# Altium PCB Flight-Controller.PcbDoc (part 3 of 3)
Units mm, origin at the board's own origin, x right, y up, seen from the top; angles counter-clockwise.
Board outline 68.4 x 90 mm, 8 copper layers (Top Layer (SIG), Int1 (GND), Int2 (PWR), Int3 (SIG), Int4 (GND), Int5 (SIG), Int6 (GND), Bottom Layer (SIG)), stack 1.559 mm thick; 188 components, 169 nets, 851 pads, 1097 vias.
Unrouted connection lines stored in the file: 2.
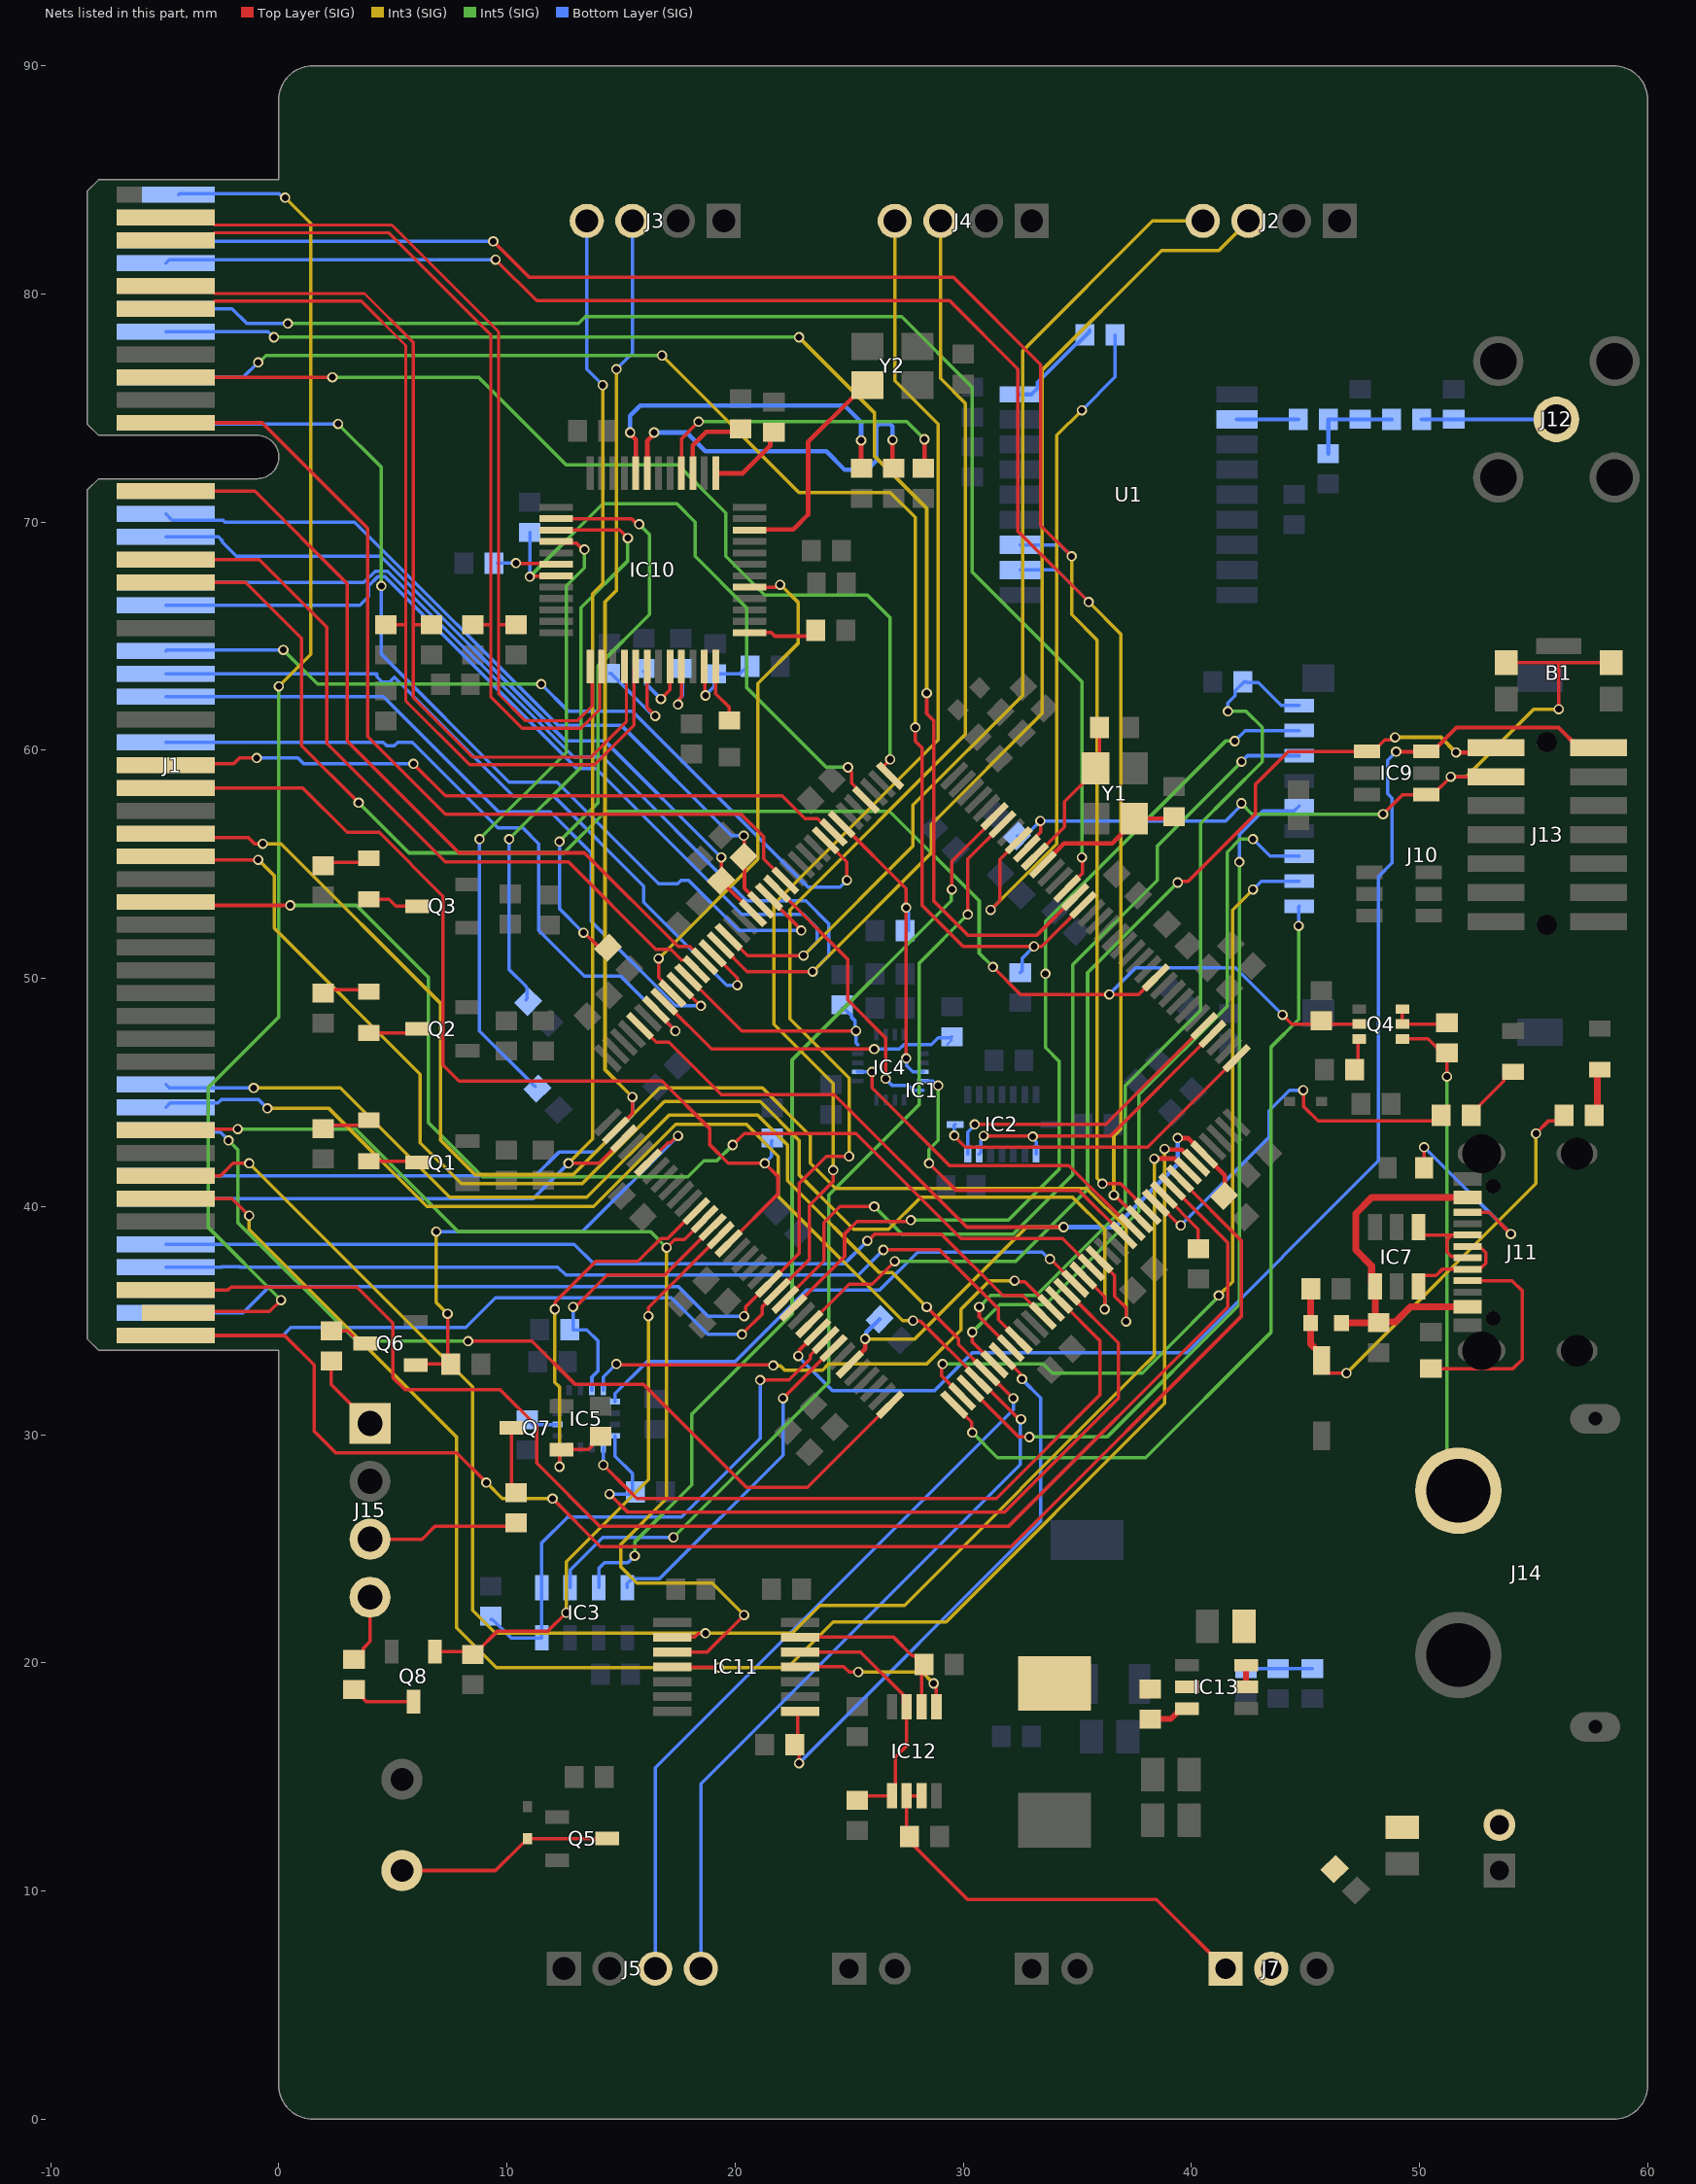
[diagram p9: the nets of this part, all layers, seen from the top]

## Via types
v1: diameter 0.45, hole 0.3, Top Layer (SIG) to Bottom Layer (SIG), tented both sides, 1085 vias
v2: diameter 0.6, hole 0.4, Top Layer (SIG) to Bottom Layer (SIG), tented both sides, 12 vias

## Nets (pads, with @x,y where several pads share a name; then routed paths per layer and width w, separated by ;. In a path a pad name is that pad's centre, name@x,y a point inside that pad or via, vN(x,y) a via of type N, cw(c..) or ccw(c..) an arc to the next point about the centre after c; other vN are vias at no path point) (continued)
EXTRA_PE9: IC1.59 J1.69 | length 33.2
  Top Layer (SIG) w0.15: IC1.59@19.016,51.102 20.1,50.018 v1(20.1,49.7)
  Bottom Layer (SIG) w0.15: J1.69@-4.95,63.35 4.3,63.35 4.3,63.224 4.534,62.99 4.866,62.99 5.071,63.195 10.266,58 12.041,58 16,54.041 16,53.334 19.634,49.7 v1(20.1,49.7)
EXTRA_PE10: IC1.60 J1.12 | length 36.2
  Top Layer (SIG) w0.15: J1.12@-4.95,71.35 -1.05,71.35 3,67.3 3,60.4 7.9,55.5 13.4,55.5 17.5,51.4 18.011,51.4 IC1.60@18.663,50.748
EXTRA_PE13: IC1.63 J1.70 | length 32.1
  Top Layer (SIG) w0.15: IC1.63@17.602,49.688 18.49,48.8 v1(18.5,48.8)
  Bottom Layer (SIG) w0.15: J1.70@-4.95,62.35 4.585,62.35 9.635,57.3 11.9,57.3 13.7,55.5 13.7,52.5 17.4,48.8 v1(18.5,48.8)
EXTRA_PG13: IC1.126 J1.30 | length 52.5
  Top Layer (SIG) w0.15: J1.30@-4.95,53.35 -4.8,53.2 v1(0.5,53.2) ; v1(19.9,42.7) 20.4,43.2 25.3,43.2 29.9,38.6 34.346,38.6 IC1.126@35.616,37.33
  Int5 (SIG) w0.15: v1(0.5,53.2) 3.4,53.2 6.55,50.05 6.55,43.68 8.93,41.3 17.934,41.3 18.634,42 19.2,42 v1(19.9,42.7)
"FC ETH RD_N": IC10.13 J1.2 R50.2 | length 39.9
  Top Layer (SIG) w0.135: J1.2@-4.95,83.35 -3.15,83.35 -2.818,83.018 4.956,83.018 9.635,78.339 9.635,62.465 10.8,61.3 13.1,61.3 13.732,61.932 13.732,63.58 IC10.13@13.65,63.662 ; 9.635,65.5 R50.2@10.4,65.5
"FC ETH RD_P": IC10.14 J1.3 R51.2 | length 40.5
  Top Layer (SIG) w0.135: J1.3@-4.95,82.35 -3.15,82.35 -2.818,82.683 4.817,82.683 9.3,78.2 9.3,65.5 ; R51.2@8.5,65.5 9.3,65.5 ; IC10.14@14.15,63.662 14.067,63.58 14.067,61.794 13.239,60.965 10.661,60.965 9.3,62.326 9.3,65.5
"FC ETH TD_N": IC10.16 J1.5 R43.1 | length 41.8
  Top Layer (SIG) w0.135: J1.5@-4.95,80.35 -3.15,80.35 -2.818,80.018 3.756,80.018 5.9,77.874 5.9,65.5 ; R43.1@6.7,65.5 5.9,65.5 ; IC10.16@15.15,63.662 15.232,63.58 15.232,62.913 15.232,61.232 13.7,59.7 8.5,59.7 5.9,62.3 5.9,65.5
"FC ETH TD_P": IC10.17 J1.6 R42.1 | length 42.4
  Top Layer (SIG) w0.135: J1.6@-4.95,79.35 -3.15,79.35 -2.818,79.683 3.617,79.683 5.565,77.735 5.565,65.5 ; R42.1@4.7,65.5 5.565,65.5 ; IC10.17@15.65,63.662 15.568,63.58 15.568,62.913 15.567,61.094 13.839,59.365 8.361,59.365 5.565,62.161 5.565,65.5
"FC FDCAN RX": IC1.136 J1.47 | length 63.5
  Top Layer (SIG) w0.15: J1.47@-4.95,36.35 -2.222,36.35 -2.097,36.475 3.425,36.475 5,34.9 5,32.5 5.529,31.971 9.701,31.971 11.3,30.372 11.3,28.759 14.059,26 32,26 41.6,35.6 41.6,38.418 IC1.136@39.152,40.866
"FC FDCAN TX": IC1.137 J1.49 | length 64
  Top Layer (SIG) w0.15: J1.49@-4.95,34.35 0.25,34.35 1.546,33.054 1.546,30.154 2.5,29.2 7.8,29.2 v1(9.1,27.9) ; v1(12,27.2) 14.1,25.1 32.1,25.1 42.2,35.2 42.2,38.5 39.505,41.195 IC1.137@39.505,41.219
  Int3 (SIG) w0.15: v1(9.1,27.9) 9.8,27.2 v1(12,27.2)
"GNSS RST": IC1.28 R27.1 | length 31
  Top Layer (SIG) w0.15: v1(31.2,53) 31.6,53.4 31.6,55.217 IC1.28@32.434,56.052
  Int3 (SIG) w0.15: v1(31.2,53) 34.1,55.9 34.1,73.8 v1(35.2,74.9)
  Bottom Layer (SIG) w0.15: v1(35.2,74.9) 36.66,76.36 R27.1@36.66,78.2
"GNSS RX": IC1.133 J1.52 U1.3 | length 82.6
  Top Layer (SIG) w0.15: v1(9.4,82.3) 10.962,80.738 29.562,80.738 33.4,76.9 33.4,69.85 v1(34.75,68.5) ; v1(36.1,41) 36.896,41 IC1.133@38.091,39.805
  Int3 (SIG) w0.15: v1(34.75,68.5) 34.75,65.95 35.872,64.828 35.872,41.238 36.1,41.01 v1(36.1,41)
  Bottom Layer (SIG) w0.15: J1.52@-4.95,82.35 -4.9,82.3 v1(9.4,82.3) ; U1.3@32.5,69 34.25,69 v1(34.75,68.5)
"GNSS TX": IC1.132 J1.53 U1.2 | length 82.7
  Top Layer (SIG) w0.15: v1(9.5,81.5) 11.3,79.7 29.4,79.7 32.4,76.7 32.4,69.6 v1(35.5,66.5) ; v1(36.6,40.5) 36.645,40.5 37.693,39.452 IC1.132@37.737,39.452
  Int3 (SIG) w0.15: v1(35.5,66.5) 36.9,65.1 36.9,43.4 36.6,43.1 v1(36.6,40.5)
  Bottom Layer (SIG) w0.15: J1.53@-4.95,81.35 -4.8,81.5 v1(9.5,81.5) ; U1.2@32.5,67.9 34.1,67.9 v1(35.5,66.5)
"HOT PLUG": J1.48 J1.50 | length 61.5
  Top Layer (SIG) w0.15: J1.48@-4.4,35.35 -4.35,35.4 -0.4,35.4 v1(0.1,35.9)
  Int5 (SIG) w0.15: v1(0,62.8) 0,48.3 -3.1,45.2 -3.1,39.1 v1(0.1,35.9)
  Int3 (SIG) w0.15: v1(0,62.8) 1.4,64.2 1.4,83.091 v1(0.276,84.216)
  Bottom Layer (SIG) w0.15: J1.50@-4.4,84.35 -4.35,84.4 0.01,84.4 0.194,84.216 v1(0.276,84.216)
"I2C4 SCL": IC1.53 J1.62 R6.2 | length 34.5
  Top Layer (SIG) w0.15: v1(20.38,56.254) 20.406,56.229 20.406,55.294 20.413,55.287 20.413,53.948 IC1.53@21.137,53.223
  Bottom Layer (SIG) w0.15: J1.62@-4.95,70.35 -4.675,70.075 -2.441,70.075 -2.366,70 3.326,70 12.226,61.1 15,61.1 19.846,56.254 v1(20.38,56.254)
"I2C4 SDA": IC1.54 J1.63 R4.2 | length 33.3
  Top Layer (SIG) w0.15: v1(19.4,55.3) 19.4,54.822 19.525,54.697 19.525,54.394 19.4,54.269 19.478,54.191 19.478,54.175 IC1.54@20.784,52.87
  Bottom Layer (SIG) w0.15: J1.63@-4.95,69.35 -2.65,69.35 -2.475,69.175 -2.475,69.124 -1.851,68.5 4.473,68.5 12.573,60.4 14.3,60.4 v1(19.4,55.3)
ICM_INT1: IC1.62 IC4.12 R21.1 | length 10.2
  Top Layer (SIG) w0.15: IC1.62@17.955,50.041 20.297,47.7 v1(25.3,47.7)
  Bottom Layer (SIG) w0.15: R21.1@24.7,48.7 24.775,48.7 25.1,48.375 25.1,48.3 25.25,48.15 25.25,47.75 v1(25.3,47.7) 25.3,47.175 IC4.12@25.375,47.1
ICM_INT2: IC1.65 IC4.19 R22.1 | length 14
  Top Layer (SIG) w0.15: IC1.65@16.895,48.981 18.975,46.9 v1(26.1,46.9)
  Bottom Layer (SIG) w0.1: R22.1@29.3,47.1 R22.1@29.5,47.3
  Bottom Layer (SIG) w0.15: v1(26.1,46.9) 27.2,46.9 27.4,47.1 27.623,47.1 27.628,47.095 27.926,47.095 27.931,47.1 IC4.19@28.225,47.1 28.6,47.1 28.893,47.393 29.453,47.393 R22.1@29.5,47.44
"JETSON RX": IC1.117 J1.95 | length 39.9
  Top Layer (SIG) w0.15: v1(26.5,38.1) 28.966,38.1 31.542,35.523 31.542,35.04 IC1.117@32.434,34.148
  Bottom Layer (SIG) w0.15: J1.95@-4.95,37.35 -2.5,37.35 -2.484,37.366 -1.716,37.366 -1.7,37.35 12.231,37.35 12.581,37 25.4,37 v1(26.5,38.1)
"JETSON TX": IC1.120 J1.94 | length 40.8
  Top Layer (SIG) w0.15: v1(25.8,38.5) 25.836,38.5 26.136,38.8 29.034,38.8 31.734,36.1 32.604,36.1 IC1.120@33.495,35.209
  Bottom Layer (SIG) w0.15: J1.94@-4.95,38.35 12.95,38.35 13.8,37.5 24.8,37.5 v1(25.8,38.5)
LPUART1_RX: IC1.99 IC9.6 J13.13 | length 59.8
  Top Layer (SIG) w0.181: v1(22.772,33.45) 22.824,33.501 22.824,33.713 IC1.99@23.612,34.502 ; v1(48.975,59.935) 50.56,59.935 51.616,60.991 56.089,60.991 56.97,60.11 J13.13@57.95,60.11
  Bottom Layer (SIG) w0.15: v1(22.772,33.45) 22.772,33.428 24.276,31.924 28.724,31.924 30.4,33.6 39.8,33.6 48.2,42 48.2,54.459 48.8,55.059 48.8,57.9 48.6,58.1 48.6,59.56 v1(48.975,59.935)
LPUART1_TX: IC1.98 IC9.1 J13.14 | length 47.4
  Top Layer (SIG) w0.15: IC1.98@23.259,34.855 25.007,36.603 26.003,36.603 v1(27,37.6) ; v1(39.4,54.2) 39.457,54.257 39.857,54.257 42.8,57.2 42.8,58.5 44.25,59.95 47.975,59.95 48.48,60.455 48.735,60.455 48.844,60.565 v1(48.925,60.565)
  Top Layer (SIG) w0.181: v1(51.6,59.9) 53.14,59.9 J13.14@53.35,60.11
  Int5 (SIG) w0.15: v1(27,37.6) 32.3,37.6 35.45,40.75 35.45,50.25 v1(39.4,54.2)
  Int3 (SIG) w0.181: v1(48.925,60.565) 50.935,60.565 v1(51.6,59.9)
"LVL SHIFT OE": IC1.115 IC11.8 R55.2 | length 25.3
  Top Layer (SIG) w0.15: v1(22.8,15.6) 22.8,16.375 22.75,16.425 22.75,17.775 IC11.8@22.85,17.875 ; IC1.115@31.727,33.441 32.518,32.651 32.518,32.493 v1(32.575,32.435)
  Bottom Layer (SIG) w0.15: v1(22.8,15.6) 33.4,26.2 33.4,31.61 v1(32.575,32.435)
"MAUWB1 RX": IC1.74 J1.91 J3.3 | length 63.5
  Top Layer (SIG) w0.15: IC1.74@14.773,43.341 14.773,43.357 15.5,44.084 v1(15.5,44.8)
  Int3 (SIG) w0.15: v1(14.8,76.7) 14.8,67 14.3,66.5 14.3,46 v1(15.5,44.8)
  Bottom Layer (SIG) w0.15: J1.91@-4.95,41.35 11.25,41.35 12.3,42.4 13.9,42.4 15.5,44 v1(15.5,44.8) ; v1(14.8,76.7) 15.5,77.4 J3.3@15.5,83.2
"MAUWB1 TX": IC1.75 J1.92 J3.4 | length 63.4
  Top Layer (SIG) w0.15: v1(12.7,41.9) 14.032,41.9 15.12,42.987 IC1.75@15.127,42.987
  Int3 (SIG) w0.15: v1(12.7,41.9) 13.758,42.958 13.758,66.858 14.2,67.3 v1(14.2,76)
  Bottom Layer (SIG) w0.15: J1.92@-4.95,40.35 11.15,40.35 v1(12.7,41.9) ; J3.4@13.5,83.2 13.5,76.7 v1(14.2,76)
"MAUWB2 RX": IC1.93 J1.97 J4.3 | length 81.6
  Top Layer (SIG) w0.15: v1(20.4,35.2) 20.457,35.257 20.457,35.59 IC1.93@21.491,36.623 22.8,37.932 22.8,41 24,42.2 v1(25,42.2)
  Int3 (SIG) w0.15: v1(25,42.2) 25,45.634 22.4,48.234 22.4,53 30.1,60.7 30.1,75.2 29,76.3 J4.3@29,83.2
  Bottom Layer (SIG) w0.15: J1.97@-4.95,35.35 -1.55,35.35 -0.4,36.5 17.5,36.5 18.8,35.2 v1(20.4,35.2)
"MAUWB2 TX": IC1.94 J1.98 J4.4 | length 81.9
  Top Layer (SIG) w0.15: v1(20.3,34.4) 21.2,35.3 21.2,35.613 21.845,36.257 IC1.94@21.845,36.27 23.25,37.675 23.25,40.05 24.3,41.1 v1(24.3,41.6)
  Int3 (SIG) w0.15: v1(24.3,41.6) 24.3,45.4 21.7,48 21.7,53.254 28.9,60.454 28.9,74.3 27,76.2 J4.4@27,83.2
  Bottom Layer (SIG) w0.15: J1.98@-4.95,34.35 0.184,34.35 0.534,34.7 8.2,34.7 9.5,36 17.2,36 18.8,34.4 v1(20.3,34.4)
MMC_INT: IC1.86 IC5.15 R23.1 | length 12.1
  Top Layer (SIG) w0.15: v1@12.9,35.5 14.4,37 16.918,37 IC1.86@19.016,39.098
  Bottom Layer (SIG) w0.15: v1@12.9,35.5 12.9,34.6 13.5,34.6 14,34.1 14,32.8 13.725,32.525 IC5.15@13.725,31.96
  other v1: 12.9,35.6
"MMWAVE DE": IC1.108 J1.89 | length 41.6
  Top Layer (SIG) w0.15: v1(8.3,34.1) 11.1,34.1 13,32.2 16,32.2 20.5,27.7 23.174,27.7 IC1.108@26.794,31.32
  Int5 (SIG) w0.15: v1(-2.2,42.9) -1.8,42.5 -1.8,39.3 3.4,34.1 v1(8.3,34.1)
  Bottom Layer (SIG) w0.15: J1.89@-4.95,43.35 -4.863,43.263 -2.563,43.263 v1(-2.2,42.9)
"MMWAVE RX": IC1.113 J1.87 J5.3 | length 78.4
  Top Layer (SIG) w0.15: v1(28.4,35.6) 29.8,34.2 29.8,33.954 IC1.113@31.02,32.734 31.043,32.734 32.177,31.6 v1(32.2,31.6)
  Int3 (SIG) w0.15: v1(-1.1,45.2) 2.705,45.2 7.502,40.404 13.504,40.404 17.1,44 21,44 22.3,42.7 22.3,41.134 26.334,37.1 26.9,37.1 v1(28.4,35.6)
  Bottom Layer (SIG) w0.15: J1.87@-4.95,45.35 -4.8,45.2 v1(-1.1,45.2) ; J5.3@16.5,6.6 16.5,15.4 32.2,31.1 v1(32.2,31.6)
"MMWAVE TX": IC1.112 J1.88 J5.4 | length 77.4
  Top Layer (SIG) w0.15: v1(27.8,35) 27.816,34.984 28.121,34.984 30.666,32.438 30.666,32.357 30.766,32.357 32.321,30.803 32.327,30.803 32.452,30.678 v1(32.533,30.678)
  Int3 (SIG) w0.15: v1(-0.5,44.3) 2.2,44.3 6.5,40 13.8,40 17.4,43.6 20.5,43.6 21.9,42.2 21.9,40.445 27.345,35 v1(27.8,35)
  Bottom Layer (SIG) w0.15: J1.88@-4.95,44.35 -4.763,44.537 -2.663,44.537 -2.5,44.7 -0.9,44.7 v1(-0.5,44.3) ; J5.4@18.5,6.6 18.5,14.7 32.5,28.7 32.5,30.645 v1(32.533,30.678)
NetBZ1_2: BZ1.2 D2.2 Q5.3 | length 9.6
  Top Layer (SIG) w0.15: BZ1.2@5.4,10.9 9.5,10.9 10.725,12.125 10.775,12.125 10.9,12.25 D2.2@10.9,12.3 Q5.3@14.4,12.3
NetC19_2: C19.2 C20.2 IC1.68 IC1.103 IC1.140 | length 46.5
  Top Layer (SIG) w0.15: IC1.68@15.834,47.92 16.554,47.2 17.1,47.2 19.4,44.9 24.35,44.9 30.15,39.1 v1(34.4,39.1)
  Top Layer (SIG) w0.2: IC1.103@25.027,33.088 25.7,33.761 v1(25.7,34.2) ; v1(39.4,43) 39.846,43 IC1.140@40.566,42.28 41.472,41.374 41.472,40.506 C19.2@41.433,40.467
  Int3 (SIG) w0.15: v1(25.7,34.2) 27.875,34.2 32.775,39.1 v1(34.4,39.1)
  Int3 (SIG) w0.2: v1@39.332,43 v1(39.4,43)
  Bottom Layer (SIG) w0.2: v1(25.7,34.2) 25.748,34.248 25.748,34.481 C20.2@26.333,35.067 ; v1(34.4,39.1) 36.65,39.1 39.4,41.85 v1(39.4,43)
NetC27_2: C27.2 IC1.25 Y1.3 | length 6.7
  Top Layer (SIG) w0.2: IC1.25@33.495,54.991 34.425,55.921 36.521,55.921 37.5,56.9 Y1.3@37.5,57 38.515,57 C27.2@39.348,57
NetC28_2: C28.2 IC1.26 Y1.1 | length 6.8
  Top Layer (SIG) w0.15: IC1.26@33.141,55.345 34.442,56.646 34.442,57.742 35.8,59.1 Y1.1@35.8,59.2 35.98,59.38 C28.2@35.98,61
NetC38_1: C38.1 IC5.10 | length 1.4
  Bottom Layer (SIG) w0.15: C38.1@10.9,30.66 11.11,30.45 IC5.10@12.215,30.45
NetC39_2: C39.2 FB2.1 IC7.4 J11.A4B9 J11.B4A9 | length 16.2
  Top Layer (SIG) w0.3: FB2.1@46.575,34.9 C39.2@48.19,34.9 ; J11.A4B9@52.1,35.6 49.6,35.6 48.944,34.944 48.234,34.944 C39.2@48.2,34.91 48.05,35.06 IC7.4@48.05,36.5 47.9,36.65 47.9,37.4 47.2,38.1 47.2,39.7 47.9,40.4 J11.B4A9@52.1,40.4
NetC40_2: C40.2 D1.2 FB2.2 R24.1 | length 20.2
  Top Layer (SIG) w0.15: D1.2@45.7,33.25 45.7,33 46,32.7 v1(46.8,32.7) ; v1(55.1,43.2) 55.663,43.763 55.963,43.763 R24.1@56.2,44
  Top Layer (SIG) w0.3: C40.2@45.24,36.4 45.233,36.393 45.233,34.908 FB2.2@45.225,34.9 45.225,33.975 45.7,33.5 D1.2@45.7,33.25
  Int3 (SIG) w0.15: v1(46.8,32.7) 55.1,41 v1(55.1,43.2)
NetC46_2: C46.2 C47.2 L1.1 R28.1 | length 4.3
  Bottom Layer (SIG) w0.185: L1.1@46,73 C46.2@46,74.5 C47.2@47.4,74.5 R28.1@48.78,74.5
NetC48_2: C48.2 J12.5 R28.2 | length 5.9
  Bottom Layer (SIG) w0.185: R28.2@50.1,74.5 C48.2@51.5,74.5 J12.5@56,74.5
NetC52_2: C52.2 IC10.37 | length 3.5
  Top Layer (SIG) w0.2: IC10.37@19.15,72.138 20.336,72.138 21.54,73.342 21.54,73.63 C52.2@21.75,73.84
NetC54_2: C54.2 C55.2 IC10.23 | length 4
  Top Layer (SIG) w0.15: IC10.23@18.65,63.662 18.675,63.637 18.675,62.425 v1(18.7,62.4)
  Bottom Layer (SIG) w0.15: v1(18.7,62.4) 19.088,62.788 19.088,63.338 19.09,63.34 20.19,63.34 C55.2@20.525,63.675
NetC56_1: C56.1 IC10.18 | length 5.1
  Top Layer (SIG) w0.15: IC10.18@16.15,63.662 16.15,61.85 v1(16.5,61.5)
  Bottom Layer (SIG) w0.15: C56.1@14.5,63.365 14.555,63.365 16.42,61.5 v1(16.5,61.5)
NetC62_1: C62.1 IC13.6 | length 1.8
  Top Layer (SIG) w0.25: C62.1@38.2,17.54 39.09,17.54 39.55,18 IC13.6@39.8,18
NetC62_2: C62.2 IC13.5 L2.1
NetC66_1: C66.1 R57.1 R58.2 | length 2.9
  Bottom Layer (SIG) w0.15: C66.1@42.4,19.76 R58.2@45.3,19.76
NetIC1_135: IC1.135 R3.1 | length 2.8
  Top Layer (SIG) w0.15: IC1.135@38.798,40.512 40.3,39.01 R3.1@40.3,38.3
NetIC7_1: IC7.1 J11.A6 J11.B6 | length 4.2
  Top Layer (SIG) w0.15: IC7.1@49.95,39.1 49.95,38.96 50.159,38.75 51.406,38.75 ; J11.A6@52.1,37.75 52.041,37.809 51.391,37.809 51.2,38 51.2,38.544 51.406,38.75 ; J11.B6@52.1,38.75 51.406,38.75
NetIC7_6: IC7.6 J11.A7 J11.B7 | length 4.9
  Top Layer (SIG) w0.15: IC7.6@49.95,36.5 49.95,36.775 50.159,36.985 50.732,36.985 50.998,37.25 J11.B7@52.1,37.25 52.159,37.31 52.699,37.31 52.911,37.521 52.911,37.979 52.699,38.19 52.159,38.19 J11.A7@52.1,38.25
NetIC10_6: IC10.6 R40.2 | length 2.6
  Top Layer (SIG) w0.15: v1(10.4,68.2) 10.425,68.175 12.137,68.175 IC10.6@12.162,68.15
  Bottom Layer (SIG) w0.15: R40.2@9.59,68.2 v1(10.4,68.2)
NetIC10_20: IC10.20 R38.1 | length 3.1
  Top Layer (SIG) w0.15: v1(16.75,62.25) 17.15,62.65 IC10.20@17.15,63.662
  Bottom Layer (SIG) w0.15: R38.1@16,63.45 16.087,63.363 16.087,62.913 v1(16.75,62.25)
NetIC10_21: IC10.21 R39.1 | length 3.3
  Top Layer (SIG) w0.15: v1(17.5,62) 17.557,62.057 17.557,62.239 17.65,62.331 IC10.21@17.65,63.662
  Bottom Layer (SIG) w0.15: v1(17.5,62) 17.557,62.057 17.557,62.239 17.7,62.381 17.7,63.375 R39.1@17.625,63.45
NetIC10_24: IC10.24 R52.1 | length 2.6
  Top Layer (SIG) w0.15: IC10.24@19.15,63.662 19.15,62.475 19.75,61.875 R52.1@19.75,61.3
NetIC10_25: IC10.25 R45.2 | length 2.9
  Top Layer (SIG) w0.15: IC10.25@20.638,65.15 21.6,65.15 21.75,65 23.15,65 R45.2@23.4,65.25
NetIC10_34: IC10.34 Y2.3 | length 9.7
  Top Layer (SIG) w0.2: IC10.34@20.638,69.65 20.661,69.673 22.548,69.673 23.2,70.325 23.2,73.5 25.2,75.5 25.7,76 Y2.3@25.8,76
NetIC10_39: IC10.39 R47.2 | length 3.6
  Top Layer (SIG) w0.2: IC10.39@18.15,72.138 18.15,73.35 18.75,73.95 R47.2@20.25,73.95
NetIC10_40: IC10.40 R49.2 | length 13.9
  Top Layer (SIG) w0.15: IC10.40@17.65,72.138 17.65,73.65 v1(18.4,74.4)
  Top Layer (SIG) w0.2: R49.2@28.25,72.5 28.3,72.55 v1(28.3,73.625)
  Int5 (SIG) w0.15: v1(18.4,74.4) 27.525,74.4 v1(28.3,73.625)
NetIC10_43: IC10.43 R41.2 | length 16.5
  Top Layer (SIG) w0.2: IC10.43@16.15,72.138 16.15,73.557 16.45,73.857 v1(16.45,73.925) ; v1(26.9,73.6) 26.9,72.55 R41.2@26.95,72.5
  Bottom Layer (SIG) w0.2: v1(16.45,73.925) 17.875,73.925 18.7,73.1 24,73.1 24.8,72.3 25.8,72.3 26.2,72.7 26.2,74.183 26.317,74.3 26.783,74.3 26.9,74.183 v1(26.9,73.6)
NetIC10_44: IC10.44 R44.2 | length 15.1
  Top Layer (SIG) w0.2: v1(15.4,73.925) 15.4,73.857 15.65,73.607 IC10.44@15.65,72.138 ; v1(25.525,73.576) 25.525,72.525 R44.2@25.55,72.5
  Bottom Layer (SIG) w0.2: v1(15.4,73.925) 15.4,74.65 15.85,75.1 24.8,75.1 25.525,74.375 v1(25.525,73.576)
NetIC11_11: IC11.11 IC12.5 | length 7.2
  Top Layer (SIG) w0.15: IC11.11@22.85,19.825 24.775,19.825 25,19.6 v1(25.4,19.6) ; v1(28.7,19.1) 28.7,19.05 28.825,18.925 IC12.5@28.825,18.075
  Int3 (SIG) w0.15: v1(25.4,19.6) 28.2,19.6 v1(28.7,19.1)
NetIC11_12: IC11.12 IC12.1 IC12.7 R56.2 | length 11.6
  Top Layer (SIG) w0.15: IC11.12@22.85,20.475 25.498,20.475 27.375,18.597 27.375,18.225 IC12.7@27.525,18.075 27.525,16.375 27.025,15.875 27.025,14.325 IC12.1@26.875,14.175 25.4,14.175 R56.2@25.35,14.125
NetIC11_13: IC11.13 IC12.6 R53.1 | length 7.7
  Top Layer (SIG) w0.15: IC11.13@22.85,21.125 26.95,21.125 27.75,20.325 27.825,20.325 28.15,20 28.15,19.925 28.175,19.9 IC12.6@28.175,18.075
NetIC12_2: IC12.2 IC12.3 J7.1 R54.1 | length 18.9
  Top Layer (SIG) w0.15: IC12.3@28.175,14.175 IC12.2@27.525,14.175 27.525,12.425 27.5,12.4 27.5,12.325 27.825,12 30.188,9.638 38.462,9.638 J7.1@41.5,6.6
NetJ11_A5: J11.A5 R25.1 | length 9.8
  Top Layer (SIG) w0.15: R25.1@50.5,32.9 54.1,32.9 54.5,33.3 54.5,36.312 54.062,36.75 J11.A5@52.1,36.75
NetJ11_B5: J11.B5 R26.1 | length 8.6
  Top Layer (SIG) w0.15: R26.1@50.2,41.7 v1(50.2,42.6) ; J11.B5@52.1,39.75 53.05,39.75 v1(54,38.8)
  Bottom Layer (SIG) w0.15: v1(50.2,42.6) v1(54,38.8)
NetJ15_1: J15.1 R64.2 | length 3.3
  Top Layer (SIG) w0.15: R64.2@2.3,33.1 2.3,32.2 J15.1@4,30.5
NetJ15_3: J15.3 R66.2 | length 6.6
  Top Layer (SIG) w0.15: J15.3@4,25.42 6.28,25.42 6.86,26 R66.2@10.4,26
NetJ15_4: J15.4 R68.2 | length 3
  Top Layer (SIG) w0.15: R68.2@3.3,20.16 3.355,20.16 3.695,20.5 3.695,20.63 4,20.935 J15.4@4,22.88
NetLED1_2: LED1.2 R1.2 | length 2.6
  Top Layer (SIG) w0.15: R1.2@52.4,44.075 52.4,44.195 53.7,45.495 53.7,45.625 53.975,45.9 LED1.2@54.1,45.9
NetLED2_2: LED2.2 R24.2 | length 2
  Top Layer (SIG) w0.3: R24.2@57.8,44 57.8,45.9 LED2.2@57.9,46
NetLED3_1: LED3.1 Q1.3 | length 2.1
  Top Layer (SIG) w0.15: LED3.1@3.95,41.986 6.018,41.986 Q1.3@6.075,41.928
NetLED3_2: LED3.2 R29.1 | length 2.1
  Top Layer (SIG) w0.15: R29.1@1.95,43.561 3.726,43.561 LED3.2@3.95,43.786
NetLED4_1: LED4.1 Q2.3 | length 2.2
  Top Layer (SIG) w0.15: LED4.1@3.95,47.618 5.906,47.618 Q2.3@6.075,47.787
NetLED4_2: LED4.2 R30.1 | length 2
  Top Layer (SIG) w0.15: R30.1@1.95,49.5 3.868,49.5 LED4.2@3.95,49.418
NetLED5_1: LED5.1 Q3.3 | length 2.3
  Top Layer (SIG) w0.15: LED5.1@3.95,53.467 4.833,53.467 5.136,53.164 Q3.3@6.075,53.164
NetLED5_2: LED5.2 R31.1 | length 2.1
  Top Layer (SIG) w0.15: R31.1@1.95,55.078 3.761,55.078 LED5.2@3.95,55.267
NetQ4_3: Q4.3 R60.2 | length 1.4
  Top Layer (SIG) w0.15: R60.2@47.3,46 47.3,47.3 Q4.3@47.35,47.35
NetQ4_5: Q4.5 Q4.6 R59.1 | length 2.7
  Top Layer (SIG) w0.15: Q4.6@49.25,48.65 Q4.5@49.25,48 51,48 R59.1@51.2,48.2
NetQ6_3: Q6.3 R64.1 | length 1.7
  Top Layer (SIG) w0.15: R64.1@2.3,34.56 3.015,34.56 3.575,34 Q6.3@3.8,34
NetQ7_3: Q7.3 R66.1 | length 2.9
  Top Layer (SIG) w0.15: Q7.3@10.2,30.3 10.2,27.66 R66.1@10.4,27.46
NetQ8_3: Q8.3 R68.1 | length 2.9
  Top Layer (SIG) w0.15: R68.1@3.3,18.84 3.355,18.84 3.695,18.5 3.695,18.445 3.84,18.3 Q8.3@5.9,18.3
NetR27_2: R27.2 U1.9 | length 4.4
  Bottom Layer (SIG) w0.181: U1.9@32.5,75.6 32.996,75.6 33.255,75.86 33.255,76.115 34.96,77.82 35.015,77.82 35.537,78.342 R27.2@35.537,78.397
NRST: B1.1 B1.2 C26.2 IC1.27 IC9.4 J13.12 | length 36.6
  Top Layer (SIG) w0.15: IC1.27@32.788,55.698 32.788,55.804 33.4,56.417 33.4,56.875 v1(33.375,56.9) ; v1(48.4,57.2) 49.25,58.05 IC9.4@50.3,58.05 50.575,58.05 v1(51.365,58.84) J13.12@53.35,58.84 ; B1.1@53.8,63.838 56.1,63.838 ; v1(56.1,61.8) 56.1,63.838 ; B1.2@58.4,63.838 56.1,63.838
  Int5 (SIG) w0.15: v1(42.192,57.674) 42.666,57.2 v1(48.4,57.2)
  Int3 (SIG) w0.15: v1(51.365,58.84) 52.04,58.84 55,61.8 v1(56.1,61.8)
  Bottom Layer (SIG) w0.15: C26.2@32.367,56.233 32.708,56.233 v1(33.375,56.9) 41.499,56.9 42.192,57.593 v1(42.192,57.674)
PC15: IC1.11 J1.16 Q4.2 R61.2 | length 69.2
  Top Layer (SIG) w0.15: J1.16@-4.95,67.35 -1.45,67.35 1,64.9 1,60.2 v1(3.5,57.7) ; v1(31.3,50.5) 32.5,49.3 v1(36.4,49.3) 37.703,49.3 IC1.11@38.445,50.041 ; v1(44,48.4) 44.4,48 45.7,48 Q4.2@47.35,48
  Int5 (SIG) w0.15: v1(3.5,57.7) 5.7,55.5 12.5,55.5 14.325,57.325 26.775,57.325 30.7,53.4 30.7,51.1 v1(31.3,50.5)
  Bottom Layer (SIG) w0.15: v1(36.4,49.3) 37.559,50.459 41.941,50.459 v1(44,48.4)
PHY_INT: IC1.40 IC10.7 R48.2 | length 27.9
  Top Layer (SIG) w0.15: v1(11,67.6) 11.025,67.625 12.137,67.625 IC10.7@12.162,67.65 ; v1(24.95,59.25) 24.95,59.169 25.106,59.013 25.106,58.553 25.734,57.925 IC1.40@25.734,57.819
  Int5 (SIG) w0.15: v1(11,67.6) 14.2,70.8 17.45,70.8 18.25,70 18.25,68.5 20.5,66.25 20.5,62.75 24,59.25 v1(24.95,59.25)
  Bottom Layer (SIG) w0.15: v1(11,67.6) R48.2@11,69.54
PHY_RST: IC1.64 IC10.29 | length 22.4
  Top Layer (SIG) w0.15: v1(16.65,50.875) 16.65,50.039 17.248,49.44 IC1.64@17.248,49.334 ; IC10.29@20.638,67.15 21.794,67.15 21.894,67.25 v1(21.975,67.25)
  Int3 (SIG) w0.15: v1(16.65,50.875) 21,55.225 21,62.925 22.775,64.7 22.775,66.467 21.992,67.25 v1(21.975,67.25)
PWM2: IC1.61 J1.15 | length 33.7
  Top Layer (SIG) w0.15: J1.15@-4.95,68.35 -0.85,68.35 2.1,65.4 2.1,60.3 7.3,55.1 12.7,55.1 16.525,51.275 17.181,51.275 17.655,50.802 17.779,50.802 17.787,50.81 17.894,50.81 IC1.61@18.309,50.395
PWM3: IC1.45 J1.68 | length 36.4
  Top Layer (SIG) w0.15: IC1.45@23.966,56.052 23.966,56.034 24.9,55.1 v1(24.9,54.3)
  Int5 (SIG) w0.15: v1(0.2,64.4) 1.7,62.9 v1(11.5,62.9)
  Bottom Layer (SIG) w0.15: J1.68@-4.95,64.35 -4.9,64.4 v1(0.2,64.4) ; v1(11.5,62.9) 12.7,61.7 15.5,61.7 23.2,54 24.6,54 v1(24.9,54.3)
PWM4: IC1.50 J1.11 | length 41.4
  Top Layer (SIG) w0.15: J1.11@-4.95,74.35 -0.724,74.35 3.9,69.726 3.9,60.6 7.3,57.2 20.266,57.2 21.259,56.206 21.259,55.241 22.198,54.302 IC1.50@22.198,54.284
PWM5: IC1.37 J1.9 | length 44.4
  Top Layer (SIG) w0.15: J1.9@-4.95,76.35 v1(2.35,76.35) ; IC1.37@26.794,58.88 26.5,59.174 26.5,59.28 26.8,59.58 v1(26.8,59.6)
  Int5 (SIG) w0.15: v1(2.35,76.35) 8.75,76.35 12.6,72.5 17.5,72.5 19.6,70.4 19.6,68.5 21.3,66.8 25.8,66.8 26.8,65.8 v1(26.8,59.6)
PWM6: IC1.66 J1.72 | length 31.2
  Top Layer (SIG) w0.15: IC1.66@16.541,48.627 16.541,48.539 v1(17.386,47.695)
  Bottom Layer (SIG) w0.15: J1.72@-4.95,60.35 4.584,60.35 4.734,60.2 5.066,60.2 5.216,60.35 5.85,60.35 9.6,56.6 10.7,56.6 11.4,55.9 11.4,52.1 13.4,50.1 14.98,50.1 v1(17.386,47.695)
RF_IN: C46.1 U1.11 | length 2.7
  Bottom Layer (SIG) w0.185: U1.11@42,74.5 C46.1@44.68,74.5
"RFD RX": IC1.58 J1.65 J2.3 | length 84.8
  Top Layer (SIG) w0.15: IC1.58@19.37,51.455 20.525,50.3 v1(23.4,50.3)
  Int3 (SIG) w0.15: v1(23.4,50.3) 28.6,55.5 28.6,56.75 33.45,61.6 33.45,76.65 38.7,81.9 41.2,81.9 J2.3@42.5,83.2
  Bottom Layer (SIG) w0.15: J1.65@-4.95,67.35 3.731,67.35 4.231,67.85 4.769,67.85 12.919,59.7 14.2,59.7 20.5,53.4 23.1,53.4 24.1,52.4 24.1,51 v1(23.4,50.3)
"RFD TX": IC1.57 J1.66 J2.4 | length 81.5
  Top Layer (SIG) w0.15: IC1.57@19.723,51.809 19.742,51.809 20.551,51 v1(23,51)
  Int3 (SIG) w0.15: v1(23,51) 27.8,55.8 27.8,57.6 32.6,62.4 32.6,77.5 38.3,83.2 J2.4@40.5,83.2
  Bottom Layer (SIG) w0.15: J1.66@-4.95,66.35 3.55,66.35 3.942,66.742 3.942,67.208 4.334,67.6 4.666,67.6 13.066,59.2 13.9,59.2 20.3,52.8 23,52.8 23.6,52.2 23.6,51.6 v1(23,51)
RGB_B: IC1.84 Q7.1 R67.2 | length 17.9
  Top Layer (SIG) w0.15: v1(12.1,35.5) 12.118,35.518 12.118,35.818 13.895,37.595 15.745,37.595 16.75,38.6 17.046,38.6 18.252,39.805 IC1.84@18.309,39.805 ; v1(12.3,28.6) Q7.1@12.3,29.35 ; Q7.1@12.4,29.35 13.575,29.35 13.705,29.48 13.705,29.6 13.905,29.8 R67.2@14.1,29.8
  Int3 (SIG) w0.15: v1(12.1,35.5) 12.1,32.3 12.3,32.1 v1(12.3,28.6)
RGB_G: IC1.78 Q6.1 R65.2 | length 21.7
  Top Layer (SIG) w0.15: Q6.1@5.9,33.05 5.95,33.1 7.4,33.1 v1(7.4,35.3) ; IC1.78@16.188,41.927 17.059,42.798 17.165,42.798 17.467,43.1 v1(17.5,43.1)
  Int3 (SIG) w0.15: v1(6.9,38.9) 6.9,35.8 v1(7.4,35.3)
  Bottom Layer (SIG) w0.15: v1(6.9,38.9) 13.3,38.9 v1(17.5,43.1)
RGB_R: IC1.87 Q8.1 R69.2 | length 25.7
  Top Layer (SIG) w0.15: Q8.1@6.85,20.5 8.36,20.5 R69.2@8.5,20.36 ; R69.2@8.695,20.5 9.595,21.4 11.8,21.4 v1(12.6,22.2) ; v1(16.2,35.2) 16.2,35.575 IC1.87@19.37,38.745
  Int3 (SIG) w0.15: v1(12.6,22.2) 12.6,24.434 16.2,28.034 v1(16.2,35.2)
SD_CARD_DETECT: IC1.116 J10.9 R16.1 | length 40.3
  Top Layer (SIG) w0.15: v1(30.7,35.6) 30.7,35.175 IC1.116@32.081,33.795
  Int5 (SIG) w0.15: v1(30.7,35.6) 31.2,36.1 33.2,36.1 37.1,40 37.1,45.3 40.4,48.6 40.4,56.791 41.624,58.016 43.1,59.491 43.1,61 42.4,61.7 v1(41.6,61.7)
  Bottom Layer (SIG) w0.15: v1(41.6,61.7) 41.6,62.068 41.92,62.388 41.92,62.605 42.315,63 42.4,63 42.437,62.963 42.937,62.963 43.933,61.967 44.713,61.967 J10.9@44.72,61.96
SDMMC1_CK: IC1.111 J10.5 | length 38.8
  Top Layer (SIG) w0.15: IC1.111@30.313,32.027 32.44,29.9 v1(32.9,29.9)
  Int5 (SIG) w0.15: v1(32.9,29.9) 36.3,29.9 42.1,35.7 v1(42.1,55.1)
  Bottom Layer (SIG) w0.15: v1(42.1,55.1) 42.1,56.3 43.135,57.335 44.495,57.335 J10.5@44.72,57.56
SDMMC1_CMD: IC1.114 J10.3 | length 32.3
  Top Layer (SIG) w0.15: v1(30.4,34.5) 30.4,34.061 IC1.114@31.374,33.088
  Int5 (SIG) w0.15: v1(30.4,34.5) 31.6,35.7 33.6,35.7 37.7,39.8 37.7,44.9 41.567,48.767 41.567,55.533 42.134,56.1 v1(42.7,56.1)
  Bottom Layer (SIG) w0.15: v1(42.7,56.1) 43.44,55.36 J10.3@44.72,55.36
SDMMC1_D0: IC1.95 J10.7 | length 40.6
  Top Layer (SIG) w0.15: IC1.95@22.198,35.916 23.9,37.618 23.9,39.3 24.6,40 v1(26.1,40)
  Int5 (SIG) w0.15: v1(26.1,40) 27.3,38.8 32.2,38.8 34.8,41.4 34.8,50.6 38.5,54.3 38.5,55.8 v1(42.2,59.5)
  Bottom Layer (SIG) w0.15: v1(42.2,59.5) 42.46,59.76 J10.7@44.72,59.76
SDMMC1_D1: IC1.96 J10.8 | length 40.4
  Top Layer (SIG) w0.15: IC1.96@22.552,35.563 24.8,37.811 24.8,38.8 25.343,39.343 27.643,39.343 v1(27.7,39.4)
  Int5 (SIG) w0.15: v1(27.7,39.4) 31.966,39.4 34.2,41.634 34.2,46.366 33.6,46.966 v1(33.6,50.2) 33.6,52.5 41.5,60.4 v1(41.9,60.4)
  Bottom Layer (SIG) w0.15: v1(41.9,60.4) 42.36,60.86 J10.8@44.72,60.86
SDMMC1_D2: IC1.109 J10.1 | length 36.5
  Top Layer (SIG) w0.15: IC1.109@29.606,31.32 30.376,30.55 30.376,30.124 v1(30.4,30.1)
  Int5 (SIG) w0.15: v1(30.4,30.1) 31.5,29 38,29 43.2,34.2 43.5,34.5 43.5,47 44.7,48.2 v1(44.7,52.3)
  Bottom Layer (SIG) w0.15: v1(44.7,52.3) 44.7,53.14 J10.1@44.72,53.16
SDMMC1_D3: IC1.110 J10.2 | length 36.1
  Top Layer (SIG) w0.15: v1(29.1,33.1) 29.058,33.058 29.058,32.575 IC1.110@29.959,31.673
  Int5 (SIG) w0.15: v1(29.1,33.1) 33.5,33.1 33.9,32.7 37.842,32.7 38.842,33.7 41.2,36.058 v1(41.2,36.1)
  Int3 (SIG) w0.15: v1(41.2,36.1) 41.8,36.7 41.8,53 v1(42.7,53.9)
  Bottom Layer (SIG) w0.15: v1(42.7,53.9) 43.06,54.26 J10.2@44.72,54.26
"SERVO DE": IC1.85 IC11.3 J1.40 | length 51.2
  Top Layer (SIG) w0.15: J1.40@-4.95,43.35 -4.9,43.4 v1(-1.8,43.4) ; v1(17,38.2) 17.364,38.564 17.775,38.564 IC1.85@18.663,39.452 ; IC11.3@17.25,20.475 18.775,20.475 v1(20.4,22.1)
  Int5 (SIG) w0.15: v1(-1.8,43.4) 3.366,43.4 7.866,38.9 16.3,38.9 v1(17,38.2)
  Int3 (SIG) w0.15: v1(17,38.2) 17,27.2 15,25.2 15,24.2 15.7,23.5 19,23.5 v1(20.4,22.1)
"SERVO RX": IC1.139 IC11.4 J1.43 | length 77.2
  Top Layer (SIG) w0.15: J1.43@-4.95,40.35 -2.05,40.35 v1(-1.3,39.6) ; IC11.4@17.25,19.825 17.262,19.813 19.287,19.813 v1(19.3,19.8)
  Top Layer (SIG) w0.2: v1(38.825,42.525) 38.85,42.5 39.568,42.5 40.142,41.927 IC1.139@40.212,41.927
  Int3 (SIG) w0.15: v1(-1.3,39.6) -1.3,39 7.8,29.9 7.8,21.534 9.534,19.8 v1(19.3,19.8) 22.3,19.8 24.3,21.8 29.25,21.8 38.825,31.375 v1(38.825,42.525)
"SERVO TX": IC1.138 IC11.2 J1.42 | length 74.7
  Top Layer (SIG) w0.15: J1.42@-4.95,41.35 -2.55,41.35 -2,41.9 -1.3,41.9 -1.298,41.898 v1(-1.296,41.898) ; IC11.2@17.25,21.125 17.262,21.137 18.237,21.137 18.382,21.282 18.682,21.282 v1(18.7,21.3)
  Top Layer (SIG) w0.2: v1(38.375,42.1) 39.261,42.1 39.788,41.573 IC1.138@39.859,41.573
  Int3 (SIG) w0.15: v1(38.375,42.1) 38.375,33.475 37.617,32.717 27.425,22.525 23.725,22.525 22.5,21.3 v1(18.7,21.3) 9.5,21.3 8.5,22.3 8.5,32.1 v1@-1.297,41.897 ; v1@-1.297,41.897 v1(-1.296,41.898)
SPI1_MISO: IC1.122 IC5.5 | length 29.9
  Top Layer (SIG) w0.15: v1(14.225,28.675) 15.3,27.6 15.7,27.2 31.45,27.2 36,31.75 36,34.118 IC1.122@34.202,35.916
  Bottom Layer (SIG) w0.15: v1(14.225,28.675) IC5.5@14.225,29.44
SPI1_MOSI: IC1.121 IC5.16 | length 23.2
  Top Layer (SIG) w0.15: v1(14.8,33.1) 14.832,33.068 21.643,33.068 v1(21.675,33.035) ; v1(32.25,36.75) 32.289,36.711 32.7,36.711 IC1.121@33.848,35.563
  Int3 (SIG) w0.15: v1(21.675,33.035) 21.697,33.013 21.989,33.013 22.178,32.824 23.824,32.824 24.1,33.1 28.4,33.1 29.9,34.6 29.9,35.5 31.15,36.75 v1(32.25,36.75)
  Bottom Layer (SIG) w0.15: IC5.16@14.225,31.96 14.225,32.525 v1(14.8,33.1)
SPI1_NSS: IC1.123 IC5.4 R15.2 | length 34.1
  Top Layer (SIG) w0.15: v1(14.5,27.4) 15.3,26.6 31.8,26.6 36.8,31.6 36.8,34.025 IC1.123@34.555,36.27
  Bottom Layer (SIG) w0.15: v1(14.5,27.4) 15.4,27.4 15.5,27.5 15.5,28.3 14.735,29.065 IC5.4@14.735,29.95
SPI1_SCK: IC1.124 IC5.1 | length 23.7
  Top Layer (SIG) w0.15: v1(33.8,37.7) 33.816,37.7 34.893,36.623 IC1.124@34.909,36.623
  Bottom Layer (SIG) w0.15: IC5.1@14.735,31.45 14.735,31.8 16.135,33.2 20,33.2 23.15,36.35 26.35,36.35 28,38 33.464,38 33.764,37.7 v1(33.8,37.7)
SPI2_MISO: IC1.30 IC3.6 | length 43.1
  Top Layer (SIG) w0.15: v1(30.2,52.8) 30.2,55.232 IC1.30@31.727,56.759
  Int5 (SIG) w0.15: v1(17.3,25.5) 24.1,32.3 24.1,40.5 28.061,44.461 28.061,50.661 v1(30.2,52.8)
  Bottom Layer (SIG) w0.15: IC3.6@12.775,23.3 12.775,24.075 14.2,25.5 v1(17.3,25.5)
SPI2_MOSI: IC1.31 IC3.7 | length 41.5
  Top Layer (SIG) w0.15: v1@29.5,54 29.5,55.134 31.374,57.008 IC1.31@31.374,57.112
  Int5 (SIG) w0.15: v1(15.6,24.7) 15.6,25.3 18.1,27.8 18.1,30.9 22.5,35.3 22.5,46.425 29.482,53.407 29.482,53.882 v1(29.5,53.9)
  Bottom Layer (SIG) w0.15: IC3.7@14.025,23.3 14.025,24.144 14.281,24.4 15.3,24.4 v1(15.6,24.7)
SPI2_NSS: IC1.100 IC3.4 IC3.5 R14.2 | length 24.4
  Top Layer (SIG) w0.15: v1(21.1,32.4) 22.366,32.4 22.966,33 23.2,33.234 23.3,33.334 23.3,33.482 IC1.100@23.966,34.148
  Bottom Layer (SIG) w0.15: R14.2@9.3,21.9 9.375,21.9 10.175,21.1 IC3.4@11.525,21.1 IC3.5@11.525,23.3 11.525,25.256 12.65,26.381 12.65,26.4 17.65,26.4 21.1,29.85 v1(21.1,32.4)
SPI2_SCK: IC1.101 IC3.8 | length 15
  Top Layer (SIG) w0.15: v1(22.1,31.6) 22.112,31.6 24.307,33.795 IC1.101@24.319,33.795
  Bottom Layer (SIG) w0.15: IC3.8@15.275,23.3 15.275,23.475 15.5,23.7 16.7,23.7 22.1,29.1 v1(22.1,31.6)
SPI3_MISO: IC1.131 IC4.9 | length 15.2
  Top Layer (SIG) w0.15: v1(26,45.9) 26,45.2 29.4,41.8 34.634,41.8 37.336,39.098 IC1.131@37.384,39.098
  Bottom Layer (SIG) w0.15: IC4.9@25.37,45.9 v1(26,45.9)
SPI3_MOSI: IC1.51 IC4.24 | length 12.1
  Top Layer (SIG) w0.15: IC1.51@21.845,53.93 24.937,50.837 24.937,49.05 26.6,47.387 v1(26.6,45.6)
  Bottom Layer (SIG) w0.15: v1(26.6,45.6) 26.9,45.3 27.6,45.3 27.795,45.105 28.225,45.105 IC4.24@28.23,45.1
SPI3_NSS: IC1.43 IC4.22 R9.2 | length 13.6
  Top Layer (SIG) w0.15: IC1.43@24.673,56.759 27.5,53.932 v1(27.5,46.5)
  Bottom Layer (SIG) w0.15: v1(27.5,46.5) 27.518,46.482 27.518,46.182 27.8,45.9 IC4.22@28.23,45.9 ; v1(27.5,53.1) 27.5,53.019 27.6,52.919 R9.2@27.6,52.1
SPI3_SCK: IC1.130 IC4.23 | length 14.2
  Top Layer (SIG) w0.15: v1(28.5,41.9) 29.7,40.7 35.075,40.7 IC1.130@37.03,38.745
  Int5 (SIG) w0.15: v1(28.5,41.9) 28.5,42.5 28.9,42.9 v1(28.9,45.3)
  Bottom Layer (SIG) w0.15: IC4.23@28.23,45.5 28.674,45.5 28.874,45.3 v1(28.9,45.3)
SPI4_MISO: IC1.4 IC2.10 IC2.15 | length 13.6
  Top Layer (SIG) w0.15: v1(30.9,43.1) 33.017,43.1 v1(33.05,43.067) ; v1@33.033,43.1 36.453,43.1 IC1.4@40.919,47.566
  Bottom Layer (SIG) w0.15: IC2.10@30.7,42.3 30.775,42.375 30.775,42.894 30.9,43.019 v1(30.9,43.1) ; v1(33.05,43.067) 33.05,42.991 33.2,42.841 IC2.15@33.2,42.3
SPI4_MOSI: IC1.5 IC2.9 | length 13.3
  Top Layer (SIG) w0.15: v1(30.5,43.6) 36.246,43.6 IC1.5@40.566,47.92
  Bottom Layer (SIG) w0.15: IC2.9@30.2,42.3 30.2,43.264 30.5,43.564 v1(30.5,43.6)
SPI4_SCK: IC1.1 IC2.8 | length 14.7
  Top Layer (SIG) w0.15: v1(29.61,43.11) 29.61,43.09 30.1,42.6 38.074,42.6 IC1.1@41.98,46.506
  Bottom Layer (SIG) w0.15: v1(29.61,43.11) 29.61,43.56 IC2.8@29.65,43.6
"SPI5 MISO": IC1.22 J1.55 | length 61.3
  Top Layer (SIG) w0.15: IC1.22@34.555,53.93 35.236,54.611 35.236,55.264 v1(35.2,55.3)
  Int5 (SIG) w0.15: v1(0.4,78.7) 13.141,78.7 13.441,79 27.3,79 30.4,75.9 30.4,67.8 35.2,63 v1(35.2,55.3)
  Bottom Layer (SIG) w0.15: J1.55@-4.95,79.35 -2.05,79.35 -1.4,78.7 v1(0.4,78.7)
"SPI5 MOSI": IC1.52 J1.60 | length 44.1
  Top Layer (SIG) w0.15: IC1.52@21.491,53.577 21.491,53.543 22.9,52.134 v1(22.9,52.1)
  Int5 (SIG) w0.15: v1(2.6,74.3) 4.5,72.4 v1(4.5,67.2)
  Bottom Layer (SIG) w0.15: J1.60@-4.95,74.35 -4.9,74.3 v1(2.6,74.3) ; v1(4.5,67.2) 4.5,64.2 10.1,58.6 12.209,58.6 16.66,54.15 17.484,54.15 17.634,54.3 17.966,54.3 20.166,52.1 v1(22.9,52.1)
"SPI5 NSS": IC1.20 J1.58 R10.2 | length 63.3
  Top Layer (SIG) w0.15: v1(27.9,61) 27.9,60.4 28.2,60.1 28.2,53.2 30,51.4 v1(33.1,51.4) 33.439,51.4 IC1.20@35.263,53.223
  Int5 (SIG) w0.15: v1(-0.9,77) -0.864,77 -0.564,77.3 v1(16.8,77.3)
  Int3 (SIG) w0.15: v1(16.8,77.3) 22.8,71.3 26.8,71.3 27.9,70.2 v1(27.9,61)
  Bottom Layer (SIG) w0.15: J1.58@-4.95,76.35 -1.55,76.35 v1(-0.9,77) ; R10.2@32.5,50.26 32.58,50.34 32.58,50.88 v1(33.1,51.4)
"SPI5 SCK": IC1.21 J1.56 | length 62.5
  Top Layer (SIG) w0.15: v1(28.4,62.5) 28.4,61.6 28.7,61.3 28.7,53.4 30.2,51.9 33.232,51.9 IC1.21@34.909,53.577
  Int5 (SIG) w0.15: v1(-0.214,78.1) v1(22.8,78.1)
  Int3 (SIG) w0.15: v1(22.8,78.1) 26.1,74.8 26.1,72.9 28.4,70.6 v1(28.4,62.5)
  Bottom Layer (SIG) w0.15: J1.56@-4.95,78.35 -0.464,78.35 v1(-0.214,78.1)
"SPI6 MISO": IC1.125 J1.28 | length 61.4
  Top Layer (SIG) w0.15: J1.28@-4.95,55.35 -4.8,55.2 v1(-0.9,55.2) ; IC1.125@35.263,36.977 36.2,36.039 v1(36.2,35.5)
  Int3 (SIG) w0.15: v1(-0.9,55.2) -0.2,54.5 -0.2,52.2 6.2,45.8 6.2,42.8 8,41 13.3,41 16.9,44.6 21.1,44.6 22.8,42.9 22.8,41.4 24.6,39.6 25.2,39 26.734,39 28.134,40.4 34.8,40.4 36.2,39 v1(36.2,35.5)
"SPI6 MOSI": IC1.127 J1.27 | length 63.9
  Top Layer (SIG) w0.15: J1.27@-4.95,56.35 -4.763,56.163 -1.319,56.163 -1.056,55.9 v1(-0.7,55.9) ; IC1.127@35.97,37.684 35.97,37.648 36.633,36.985 36.633,36.067 37.138,35.562 v1(37.138,34.962)
  Int3 (SIG) w0.15: v1(-0.7,55.9) 0.1,55.9 7.1,48.9 7.1,42.9 8.6,41.4 12.9,41.4 16.7,45.2 21.2,45.2 23.3,43.1 23.3,41.9 24.4,40.8 35.4,40.8 37.138,39.062 v1(37.138,34.962)
"SPI6 NSS": IC1.88 J1.25 R13.2 | length 43.6
  Top Layer (SIG) w0.15: J1.25@-4.95,58.35 1.05,58.35 3,56.4 4.4,56.4 7.2,53.6 7.2,46.2 7.9,45.5 16.8,45.5 18.9,43.4 18.9,42.7 19.7,41.9 v1(21.3,41.9) 21.882,41.318 21.882,40.55 IC1.88@19.723,38.391
  Bottom Layer (SIG) w0.15: v1(21.3,41.9) 21.6,42.2 21.6,42.85 R13.2@21.625,42.875
"SPI6 SCK": IC1.44 J1.24 | length 30.7
  Top Layer (SIG) w0.15: J1.24@-4.95,59.35 -4.9,59.4 -1.981,59.4 -1.719,59.663 v1(-0.963,59.663) ; v1(5.9,59.4) 7.3,58 22.066,58 23.058,57.008 23.611,57.008 24.213,56.405 IC1.44@24.319,56.405
  Bottom Layer (SIG) w0.15: v1(-0.963,59.663) 0.837,59.663 1.1,59.4 v1(5.9,59.4)
STAT_LEDR: IC1.134 R1.1 | length 17
  Top Layer (SIG) w0.15: IC1.134@38.445,40.159 38.498,40.159 39.482,39.175 v1(39.535,39.175) ; v1(44.9,45.1) 44.918,45.082 44.918,44.382 45.55,43.75 50.55,43.75 R1.1@50.8,44
  Bottom Layer (SIG) w0.15: v1(39.535,39.175) 43.4,43.04 43.4,44.2 44.3,45.1 v1(44.9,45.1)
TXD0: IC10.3 R5.2 | length 26
  Top Layer (SIG) w0.15: IC10.3@12.162,69.65 14.95,69.65 v1(15.3,69.3)
  Int5 (SIG) w0.15: v1(10.1,56.1) 13.25,59.25 13.25,66.25 15.3,68.3 v1(15.3,69.3)
  Bottom Layer (SIG) w0.15: v1(10.1,56.1) 10.1,50.391 10.838,49.653 10.838,49.628 10.887,49.578 10.887,49.119 R5.2@10.834,49.066
TXD1: IC10.4 R7.2 | length 27.8
  Top Layer (SIG) w0.15: IC10.4@12.162,69.15 12.237,69.075 13.044,69.075 13.319,68.8 v1(13.4,68.8)
  Int5 (SIG) w0.15: v1(8.8,56.1) 12.6,59.9 12.6,67.2 13.4,68 v1(13.4,68.8)
  Bottom Layer (SIG) w0.15: v1(8.8,56.1) 8.8,47.7 R7.2@11.234,45.266
TXEN: IC10.2 R8.2 | length 25.1
  Top Layer (SIG) w0.15: IC10.2@12.162,70.15 15.469,70.15 15.719,69.9 v1(15.8,69.9) ; v1(13.358,52) 13.4,52 13.959,51.441 R8.2@14.334,51.441
  Int5 (SIG) w0.15: v1(12.3,56) 14,57.7 14,63.7 16.25,65.95 16.25,69.45 v1(15.8,69.9)
  Bottom Layer (SIG) w0.15: v1(12.3,56) 12.3,53.058 v1(13.358,52)
V2S: C1.2 C2.2 J6.2 J7.2
VBAT: C63.2 IC13.2 IC13.3 J14.3 Q4.4 R59.2 | length 22.5
  Top Layer (SIG) w0.15: Q4.4@49.25,47.35 50.375,47.35 51.125,46.6 51.2,46.6 v1(51.2,45.7)
  Top Layer (SIG) w0.25: IC13.2@42.4,18.95 IC13.3@42.4,19.9
  Int5 (SIG) w0.15: v1(51.2,45.7) 51.2,28.05 J14.3@51.7,27.55
pads on no net: B1.5 IC1.15 IC4.1 IC4.2 IC4.3 IC4.4 IC4.5 IC4.6 IC4.7 IC4.10 IC4.14 IC4.15 IC4.16 IC4.17 IC4.21 IC5.3 IC5.6 IC5.7 IC5.8 IC5.12 IC5.14 IC7.3 IC8.3 IC9.3 IC10.1 IC10.5 IC10.8 IC10.9 IC10.10 IC10.11 IC10.12 IC10.33 IC10.38 IC10.41 IC10.42 IC10.45 IC10.46 IC11.5 IC11.6 IC11.9 IC11.10 J10.Un1 J10.Un2 J11.A8 J11.B8 J11.Un1 J11.Un2 J13.1 J13.2 J13.8 J13.9 J13.10 J14.1 J14.2 U1.4 U1.5 U1.6 U1.13 U1.15 U1.16 U1.17 U1.18 Y2.1

## Polygon pours and split planes (outlines as drawn)
DGND on Top Layer (SIG) "NONET_L-01_P-001" (solid, pour order 35): -7.2,90 60,90 60,0 -7.2,0
+3V3 on Top Layer (SIG) "+3V3_L01_P019" (solid, pour order 19): -7.2,63.8 -1.3,63.8 -1.3,60.9 -7.2,60.9
V2S on Top Layer (SIG) "V2S_L01_P020" (solid, pour order 20): 54.4,13.8 54.4,12 48.2,12 44.5,8.3 44.5,5.5 42.5,5.5 42.5,8.9 47.4,13.8
VBAT on Top Layer (SIG) "VBAT_L01_P021" (solid, pour order 21): 51.66,25.1 ccw(c51.66,27.64) 54.2,27.64 54.199,27.8 ccw(c51.85,27.75) 51.85,30.1 49.5,30.1 41.7,22.3 41.7,19.5 44.6,19.5 50.2,25.1
+5V on Top Layer (SIG) "+5V_L01_P029" (solid, pour order 29): 39.1,16 39.1,11.7 32.1,11.7 32.1,16
NetC62_2 on Top Layer (SIG) "NETC62_2_L01_P025" (solid, pour order 25): 40.4,19.5 38.6,19.5 37.4,20.7 32.1,20.7 32.1,17.6 37.2,17.6 37.9,18.3 40.4,18.3
DGND on Bottom Layer (SIG) "DGND_ETH" (solid, remove dead copper, pour order 31): -7.2,0 60,0 60,90 -7.2,90
+5V on Bottom Layer (SIG) "+5V_L08_P026" (solid, pour order 26): -7.2,59.8 -7.2,52.9 -1.4,52.9 -1.4,59.8
+3V3 on Bottom Layer (SIG) "NONET_L-01_P-001" (solid, pour order 22): 37.15,26.45 33.75,26.45 33.75,21.05 34.85,19.95 34.85,18.05 36.05,18.05 36.05,19.95 37.15,21.05
+3V3 on Bottom Layer (SIG) "+3V3_L08_P011" (solid, pour order 11): 33.4,75 31,75 30.9,75.1 29.2,75.1 29.2,72.8 31,72.8 31.1,72.9 33.4,72.9
+5V on Bottom Layer (SIG) "+5V_L08_P018" (solid, pour order 18): 34.3,15.5 37.1,15.5 37.1,12.1 32.4,12.1 32.4,20.1 33.8,20.1 33.8,16
+3V3 on Int2 (PWR) "NONET_L-01_P-001" (solid, pour order 32): -7.2,90 60,90 60,0 -7.2,0
DGND on Int2 (PWR) "DGND_L03_P015" (solid, pour order 15): 40.001,79 60,79 60,65.2 39.9,65.2
+5V on Int3 (SIG) "DGND" (solid, remove dead copper, pour order 37): -7.1,85.5 -7.1,90.2 60,90.2 60,0 -7.1,0 -7.1,33.7
DGND on Int3 (SIG) "DGND_L04_P036" (solid, pour order 36): 40.001,79 60,79 60,65.2 39.9,65.2
DGND on Int1 (GND) "NONET_L-01_P-001" (solid, pour order 6): -7.2,90 60,90 60,0 -7.2,0
DGND on Int4 (GND) "NONET_L-01_P-001" (solid, pour order 17): -7.2,90 60,90 60,0 -7.2,0
DGND on Int5 (SIG) "NONET_L-01_P-001" (solid, pour order 33): -7.2,90 60,90 60,0 -7.2,0
DGND on Int6 (GND) "NONET_L-01_P-001" (solid, pour order 34): -7.2,90 60,90 60,0 -7.2,0

## Silkscreen, mask and mechanical layers (free items; w line width, h text height)
Top Overlay:
  drawing of 16 lines, arcs and shapes, not listed
  text "MAUWB UART" at 12.24,80.311 h1.5
  text "MAUWB UART" at 25.74,80.311 h1.5
  text "RFD UART" at 40.405,80.311 h1.5
  text "ULYSSES  / FLIGHT CONTROLLER / REV 2.0 /  / UBC ROCKET / THRUST VECTORING" at 31.3,64.934 h2
  text "R" at 8.104,29.902 h2
  text "A" at 8.058,27.402 h2
  text "B" at 8.147,24.902 h2
  text "G" at 8.066,22.403 h2
  text "2S" at 52.199,11.271 h1.5 r90
  text "MMWAVE UART" at 10.783,8.811 h1.5
  text "ESC PWM" at 23.162,8.802 h1.5
  text "ESC PWM" at 31.162,8.802 h1.5
  text "SERVO TTL" at 40.075,8.552 h1.5
Board:
  circle w0.2: c3.5,86.5 r1.6
  circle w0.2: c56.5,86.5 r1.6
  circle w0.2: c56.5,3.5 r1.6
  circle w0.2: c3.5,3.5 r1.6
  lines w0.2: 0,33.7 0,1.5 ccw(c1.5,1.5) 1.5,0 58.5,0 ccw(c58.5,1.5) 60,1.5 60,88.5 ccw(c58.5,88.5) 58.5,90 1.5,90 ccw(c1.5,88.5) 0,88.5 ; 0,88.5 0,85 0,88.5